# Altium PCB schematics.PcbDoc
Units mm, origin at the board's own origin, x right, y up, seen from the top; angles counter-clockwise.
Board outline 38.04 x 79.9 mm, 2 copper layers (Top Layer, Bottom Layer); 4 components, 17 nets, 52 pads, 0 vias.
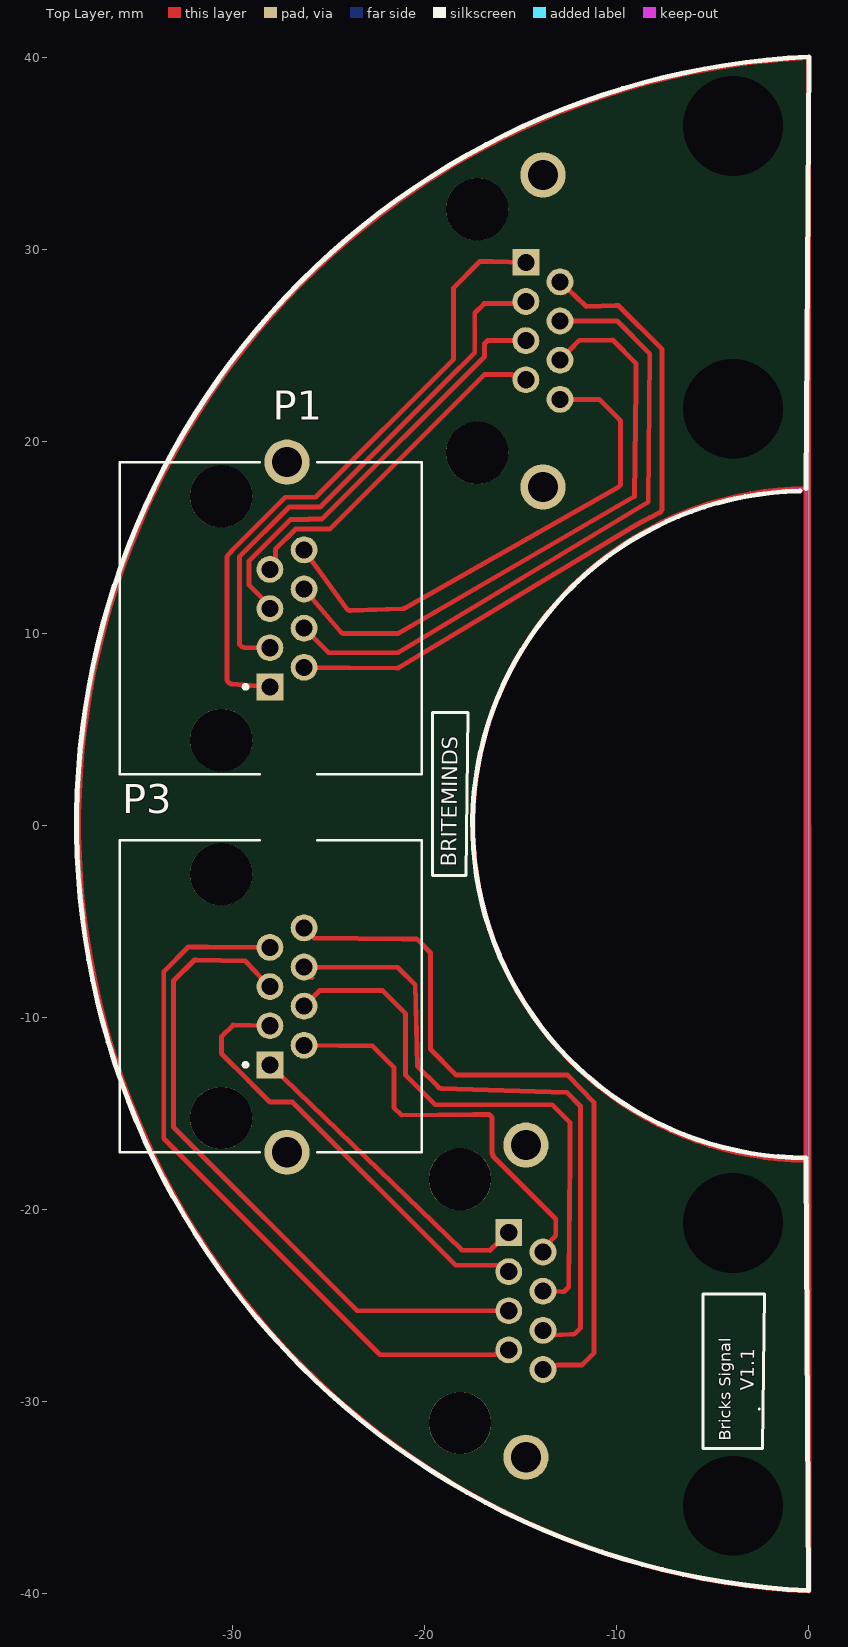
[diagram p0: Top Layer view]
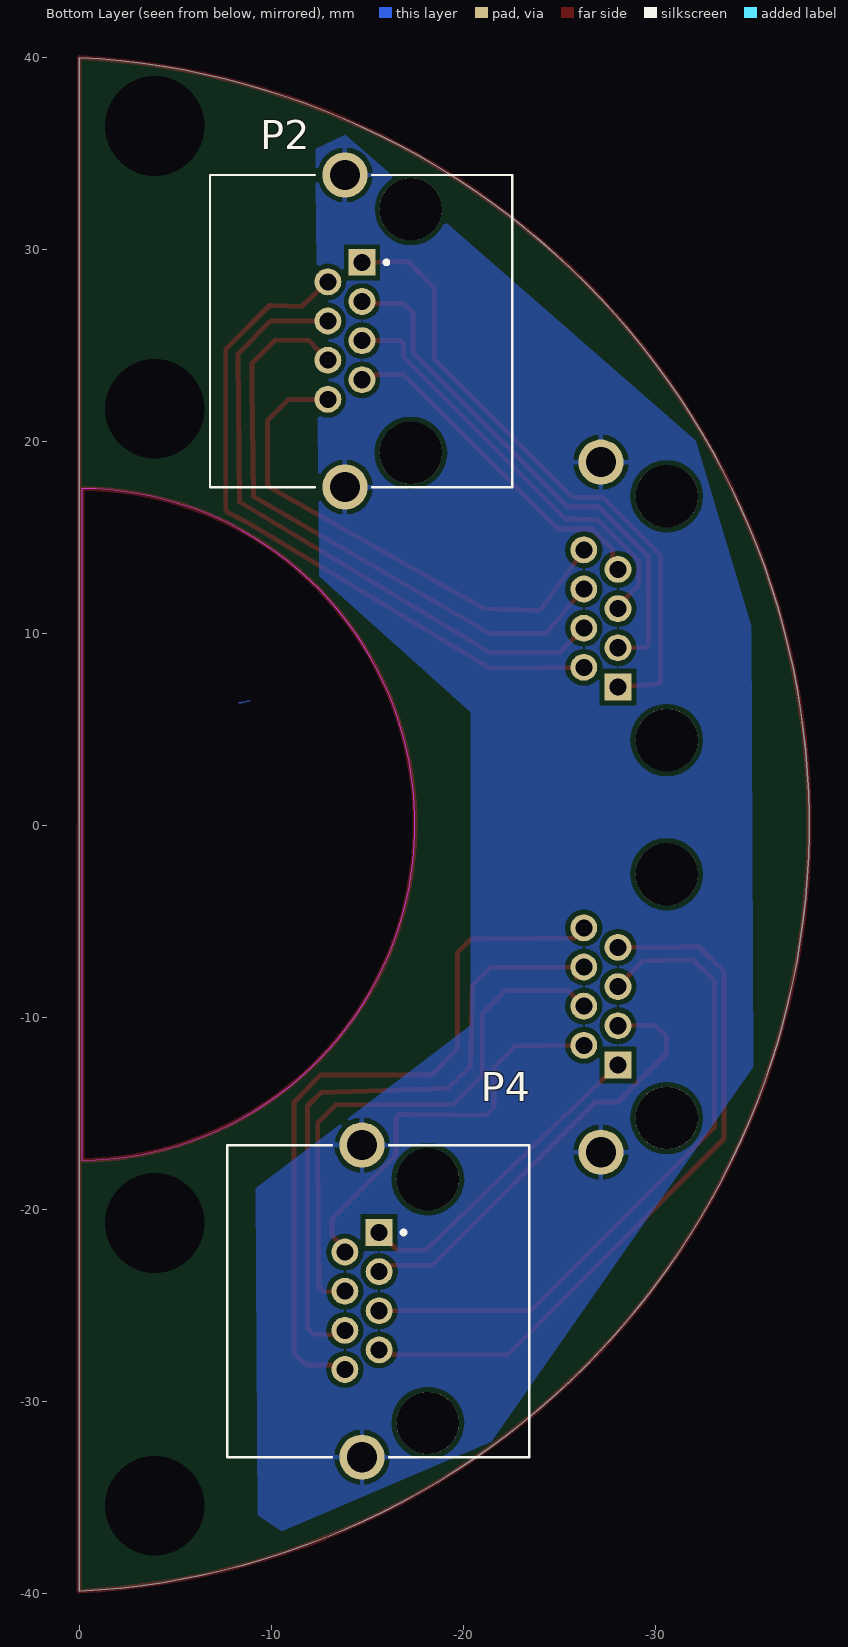
[diagram p1: Bottom Layer view, seen from below]

## Layer stack, top to bottom
Top Solder: solder mask 0.0102, Solder Resist, Dk 3.5
Top Layer: signal copper 0.0356
Dielectric 1: dielectric 0.32, FR-4, Dk 4.8
Bottom Layer: signal copper 0.0356
Bottom Solder: solder mask 0.0102, Solder Resist, Dk 3.5

## Board outline
0.012,-39.89 cw(c1.968,0.062) 0,40.014
cut-out: -0.139,-17.438 cw(c0.006,0.062) -0.139,17.561

## Design rules (kind name [scope] priority, off if disabled: settings)
Clearance [All] p1: gap=0.254 ignorepadtopadclearanceinfootprint=FALSE except(0: Arc-Hole Track-Hole SMDPad-Hole THPad-Hole Via-Hole Fill-Hole Poly-Hole Region-Hole Text-Hole)
HoleSize [All] p1: absolutevalues=TRUE maxlimit=5.2 minlimit=0.025 maxpercent=80.000 minpercent=20.000
MinimumSolderMaskSliver [All] p1: minsoldermaskwidth=0.1
PolygonConnect [All] p1: connectstyle=Relief reliefconductorwidth=0.254 reliefentries=4 polygonreliefangle="90 Angle" airgapwidth=0.254
RoutingVias [All] p1: holewidth=0.711 width=1.27 viastyle="Through Hole" minholewidth=0.711 minwidth=1.27 maxholewidth=0.711 maxwidth=1.27
SilkToSolderMaskClearance [IsPad] p1: minsilkscreentomaskgap=0.1 clearancetoexposedcopper=TRUE
SolderMaskExpansion [All] p1: expansion=0.102 istentingtop=FALSE
UnpouredPolygon [All] p1: allowunpoured=TRUE
Width [All] p1: maxlimit=0.254 minlimit=0.254 preferedwidth=0.254
26 further rules are at their usual default settings.

## Classes and differential pairs
component class sheet: P2 P422

## Components (designator, comment, footprint, x,y, rotation, side; value= is the part's Value field where it differs from the comment)
P1 "1-406541-5" TE_1-406541-5#1 -28.069,7.227 r270 top
P2 "1-406541-5" TE_1-406541-5#2 -14.734,29.349 r90 bottom
P3 "1-406541-5" TE_1-406541-5#3 -28.069,-12.466 r270 top
P4 "1-406541-5" TE_1-406541-5#2 -15.623,-21.197 r90 bottom

## Footprints (in the part's own frame and the unit in brackets; to place one, negate y for a bottom-side part, rotate by r counter-clockwise, add the part's x,y. Pads: shape width x height; smd on the part's side, far side on the other; paste and mask are expansions set on the pad)
TE_1-406541-5#1 [mm]
  rect 1.398x1.398 hole 0.89: 1(0,0)
  round 1.398 hole 0.89: 2(-1.02,1.78) 3(-2.04,0) 4(-3.06,1.78) 5(-4.08,0) 6(-5.1,1.78) 7(-6.12,0) 8(-7.14,1.78)
  round 2.355 on Bottom Solder: S1(4.55,0.89)
  round 2.355 hole 1.57: S2(-11.71,0.89)
  round 3.25 hole 3.25 unplated: ""(-9.93,-2.54) ""(2.77,-2.54)
  silkscreen extent -11.71,-7.82 4.55,7.92, body extent -11.69,-7.75 4.58,8, height 13.4
TE_1-406541-5#2 [mm]
  rect 1.398x1.398 hole 0.89: 1(0,0)
  round 1.398 hole 0.89: 2(-1.02,1.78) 3(-2.04,0) 4(-3.06,1.78) 5(-4.08,0) 6(-5.1,1.78) 7(-6.12,0) 8(-7.14,1.78)
  round 2.355 hole 1.57: S1(4.55,0.89) S2(-11.71,0.89)
  round 3.25 hole 3.25 unplated: ""(-9.93,-2.54) ""(2.77,-2.54)
  silkscreen extent -11.71,-7.82 4.55,7.92, body extent -11.69,-7.75 4.58,8, height 13.4
TE_1-406541-5#3 [mm]
  rect 1.398x1.398 hole 0.89: 1(0,0)
  round 1.398 hole 0.89: 2(-1.02,1.78) 3(-2.04,0) 4(-3.06,1.78) 5(-4.08,0) 6(-5.1,1.78) 7(-6.12,0) 8(-7.14,1.78)
  round 2.355 hole 1.57: S1(4.55,0.89)
  round 2.355 on Bottom Solder: S2(-11.71,0.89)
  round 3.25 hole 3.25 unplated: ""(-9.93,-2.54) ""(2.77,-2.54)
  silkscreen extent -11.71,-7.82 4.55,7.92, body extent -11.69,-7.75 4.58,8, height 13.4

## Part data
P1 P2 P3 P4: "Conn RJ-45 F 8 POS 2.04mm Solder RA Thru-Hole 8 Terminal 1 Port Cat 5 Box/Tray", Package=None, Availability=Unavailable, MF="{'manufacturer': u'TE Connectivity'}", MP=1-406541-5, Price=None

## Free pads (board coordinates)
  round 1.524 hole 5.2: 26(-3.937,-35.433) 26(-3.937,-20.701) 26(-3.937,21.717) 26(-3.937,36.449)

## Nets (pads, with @x,y where several pads share a name; then routed paths per layer and width w, separated by ;. In a path a pad name is that pad's centre, name@x,y a point inside that pad or via, vN(x,y) a via of type N, cw(c..) or ccw(c..) an arc to the next point about the centre after c; other vN are vias at no path point)
GND: P1.S2 P2.S1 P2.S2 P3.S1 P4.S1 P4.S2 | length 0.6
  Top Layer w0.254: P1.S2 P1.S2@-27.063,18.937 ; P2.S2@-14.185,17.298 P2.S2
NetP1_1: P1.1 P2.1 | length 32.9
  Top Layer w0.254: P1.1 -30.066,7.382 cw(c-30.046,7.635) -30.3,7.635 -30.3,13.951 cw(c-30.046,13.951) -30.235,14.12 -30.048,14.329 -30.036,14.344 -27.272,17.108 -25.692,17.108 -18.5,24.3 -18.5,28.02 -17.127,29.393 -16.514,29.393 -16.5,29.393 P2.1
NetP1_2: P1.2 P2.2 | length 36.1
  Top Layer w0.254: P1.2 -21.47,8.201 ; -21.47,8.201 ccw(c-21.468,8.455) -21.337,8.237 -9.278,15.492 cw(c0.006,0.062) -7.778,16.301 ccw(c-7.888,16.53) -7.634,16.532 -7.634,24.821 -9.911,27.099 -10.021,27.099 -10.029,27.099 -11.587,27.048 P2.2
NetP1_3: P1.3 P2.3 | length 28.1
  Top Layer w0.254: P1.3 -29.407,9.287 -29.508,9.29 -29.657,9.439 -29.657,9.541 -29.657,14.005 -27.062,16.6 -25.443,16.6 -18.868,23.175 -17.397,24.646 -17.397,26.71 -16.907,27.2 -16.2,27.2 -14.734,27.2 -14.625,27.2 P2.3
NetP1_4: P1.4 P2.4 | length 33.8
  Top Layer w0.254: P1.4 -25.011,9.009 -21.474,9.009 -21.403,9.009 -21.343,9.045 -21.166,9.152 -8.357,16.863 -8.278,24.479 -8.278,24.587 -9.987,26.296 P2.4
NetP1_5: P1.5 P2.5 | length 22.5
  Top Layer w0.254: P1.5 -28.069,11.452 -29.149,12.532 -29.149,13.794 -26.988,15.955 -26.045,15.955 -26.034,15.966 -25.358,15.966 -16.889,24.436 -16.889,25.111 -16.731,25.269 P2.5
NetP1_6: P1.6 P2.6 | length 32
  Top Layer w0.254: P1.6 -24.376,10.089 ; -24.376,10.089 ccw(c-24.183,10.254) -24.183,10 -21.468,10 ccw(c-21.468,10.254) -21.341,10.034 -9.081,17.153 -9,22.894 -9,22.9 -9,24.087 -10.212,25.3 -10.22,25.299 -11.951,25.278 P2.6
NetP1_7: P1.7 P2.7 | length 18.1
  Top Layer w0.254: P1.7 -27.785,13.872 -27.785,14.398 -26.736,15.447 -24.953,15.447 -16.9,23.5 -15.455,23.5 -15.403,23.448 -14.953,23.448 P2.7
NetP1_8: P1.8 P2.8 | length 26.8
  Top Layer w0.254: P1.8 -24.079,11.31 ccw(c-23.873,11.459) -23.865,11.205 -21.162,11.298 ; -21.161,11.298 ccw(c-21.171,11.552) -21.046,11.331 -9.929,17.627 -9.8,17.756 -9.8,21.1 -10.909,22.209 P2.8
NetP3_1: P3.1 P4.1 | length 16.7
  Top Layer w0.254: P3.1 -18.084,-22.107 -16.603,-22.137 P4.1
NetP3_2: P3.2 P4.2 | length 21.2
  Top Layer w0.254: P3.2 -22.71,-11.49 -21.607,-12.593 -21.607,-14.693 -21.209,-15.091 -17.464,-15.051 -17.461,-15.051 -16.649,-15.051 -16.5,-15.199 -16.5,-17.084 -16.448,-17.136 -16.448,-17.22 -13.174,-20.494 -13.174,-21.358 -13.843,-22.027 P4.2
NetP3_3: P3.3 P4.3 | length 23.3
  Top Layer w0.254: P3.3 -29.988,-10.393 -30.6,-10.995 -30.6,-11.872 -29.149,-13.323 -28.926,-13.546 -28.072,-14.4 -26.9,-14.4 -18.397,-22.903 -16.266,-22.903 -15.933,-23.237 P4.3
NetP3_4: P3.4 P4.4 | length 28.9
  Top Layer w0.254: P3.4 -25.483,-8.6 -22.2,-8.6 -21,-9.8 -21,-13 -19.457,-14.543 -13.357,-14.543 -12.428,-15.472 -12.428,-17.262 -12.428,-17.269 -12.428,-17.274 -12.496,-23.937 -12.497,-24.04 -12.571,-24.114 -12.671,-24.214 -12.745,-24.289 -12.859,-24.289 P4.4
NetP3_5: P3.5 P4.5 | length 35.1
  Top Layer w0.254: P3.5 -29.365,-7.044 -31.888,-7 -31.893,-7 -32,-7 -33.092,-8.092 -33.092,-15.708 -23.523,-25.277 P4.5
NetP3_6: P3.6 P4.6 | length 34.1
  Top Layer w0.254: -25.875,-7.929 P3.6 -21.415,-7.393 -20.496,-8.293 -20.383,-12.539 -19.307,-13.614 -19.236,-13.685 -19.136,-13.689 -12.601,-13.899 -11.892,-14.608 -11.892,-16.427 -11.892,-26.181 -12.211,-26.501 -12.406,-26.501 -12.419,-26.501 -13.555,-26.558 P4.6
NetP3_7: P3.7 P4.7 | length 37.5
  Top Layer w0.254: P3.7 -31.323,-6.323 -31.334,-6.323 -32.316,-6.323 -33.6,-7.607 -33.6,-16.3 -22.332,-27.568 -16.344,-27.568 -16.312,-27.536 -15.842,-27.536 P4.7
NetP3_8: P3.8 P4.8 | length 37.9
  Top Layer w0.254: P3.8 -25.774,-5.852 -21.203,-5.9 -21.202,-5.9 -20.427,-5.9 -19.7,-6.627 -19.7,-10.7 -19.7,-11.653 -18.353,-13 -17.4,-13 -12.554,-13 -11.193,-14.421 -11.193,-27.493 -11.8,-28.1 -13.122,-28.1 -13.14,-28.118 -13.624,-28.118 P4.8
pads on no net: P1. P1.S1 P2. P3. P3.S2 P4.
copper on no net: | length 291.3
  Top Layer w0.254: -0.139,-17.438 cw(c0.006,0.062) -0.139,17.561 -0.139,-17.438 ; 0,40.014 ccw(c1.968,0.062) 0.012,-39.89 0,40.014

## Polygon pours and split planes (outlines as drawn)
GND on Bottom Layer "GND_L02_P008" (solid, pour order 8): -32.128,20.041 -13.867,35.985 -12.314,35.271 -12.5,13 -20.4,5.9 -20.4,-10.4 -9.2,-18.9 -9.293,-35.936 -10.555,-36.764 -21.454,-32.107 -35.105,-12.552 -35,10.4
no net on Bottom Layer "NONET_L02_P003" (solid, pour order 3): -8.3,6.4 -8.5,6.4 -8.9,6.5

## Silkscreen, mask and mechanical layers (free items; w line width, h text height)
Top Overlay:
  lines w0.15: -19.6,-2.6 -17.857,-2.6 -17.754,5.9 -19.6,5.9 -19.6,-2.6 ; -5.5,-32.459 -5.5,-24.4 -2.3,-24.4 -2.325,-26.4 -2.375,-30.4 -2.401,-32.459 -5.5,-32.459 ; -2.575,-30.4 -2.575,-30.4
  lines w0.254: -0.447,17.43 ccw(c-0.139,0.062) -0.139,-17.309 ; -0.139,-17.438 -0.003,-39.857 cw(c1.854,0.1) 0.025,40.058 -0.139,17.561
  text "BRITEMINDS" at -18.348,-2.148 h0.8 r89.3
  text "V1.1" at -2.847,-29.447 h0.7 r89.03
  text "Bricks Signal" at -4.05,-32.05 h0.6 r90